# EAGLE board PCBAv (EAGLE 9.6.2)
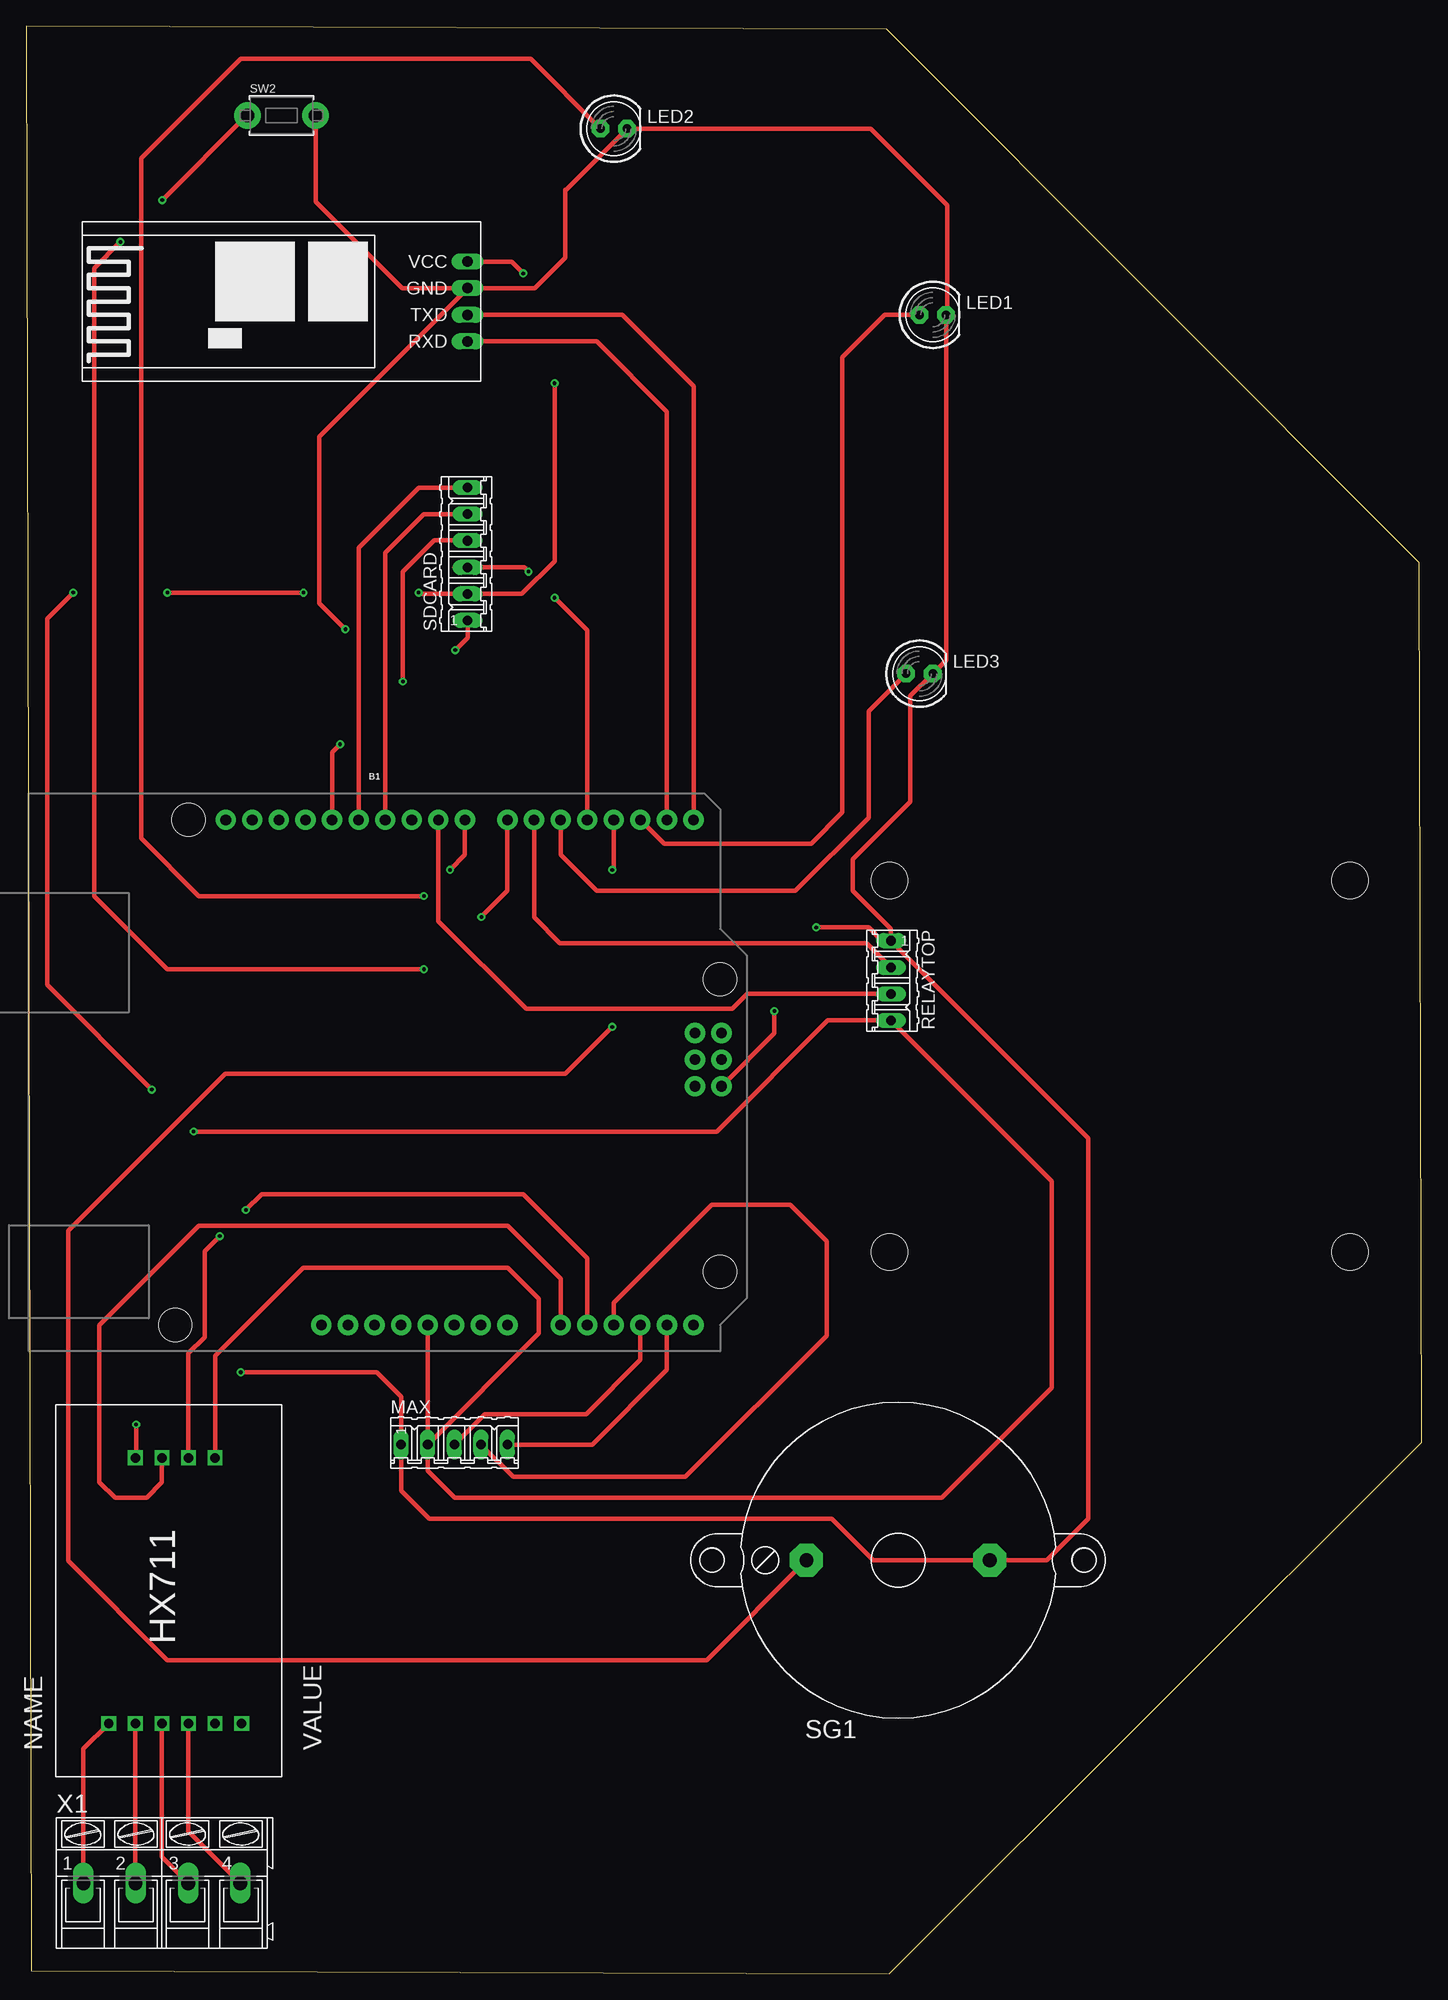
[diagram p0: board, top side]
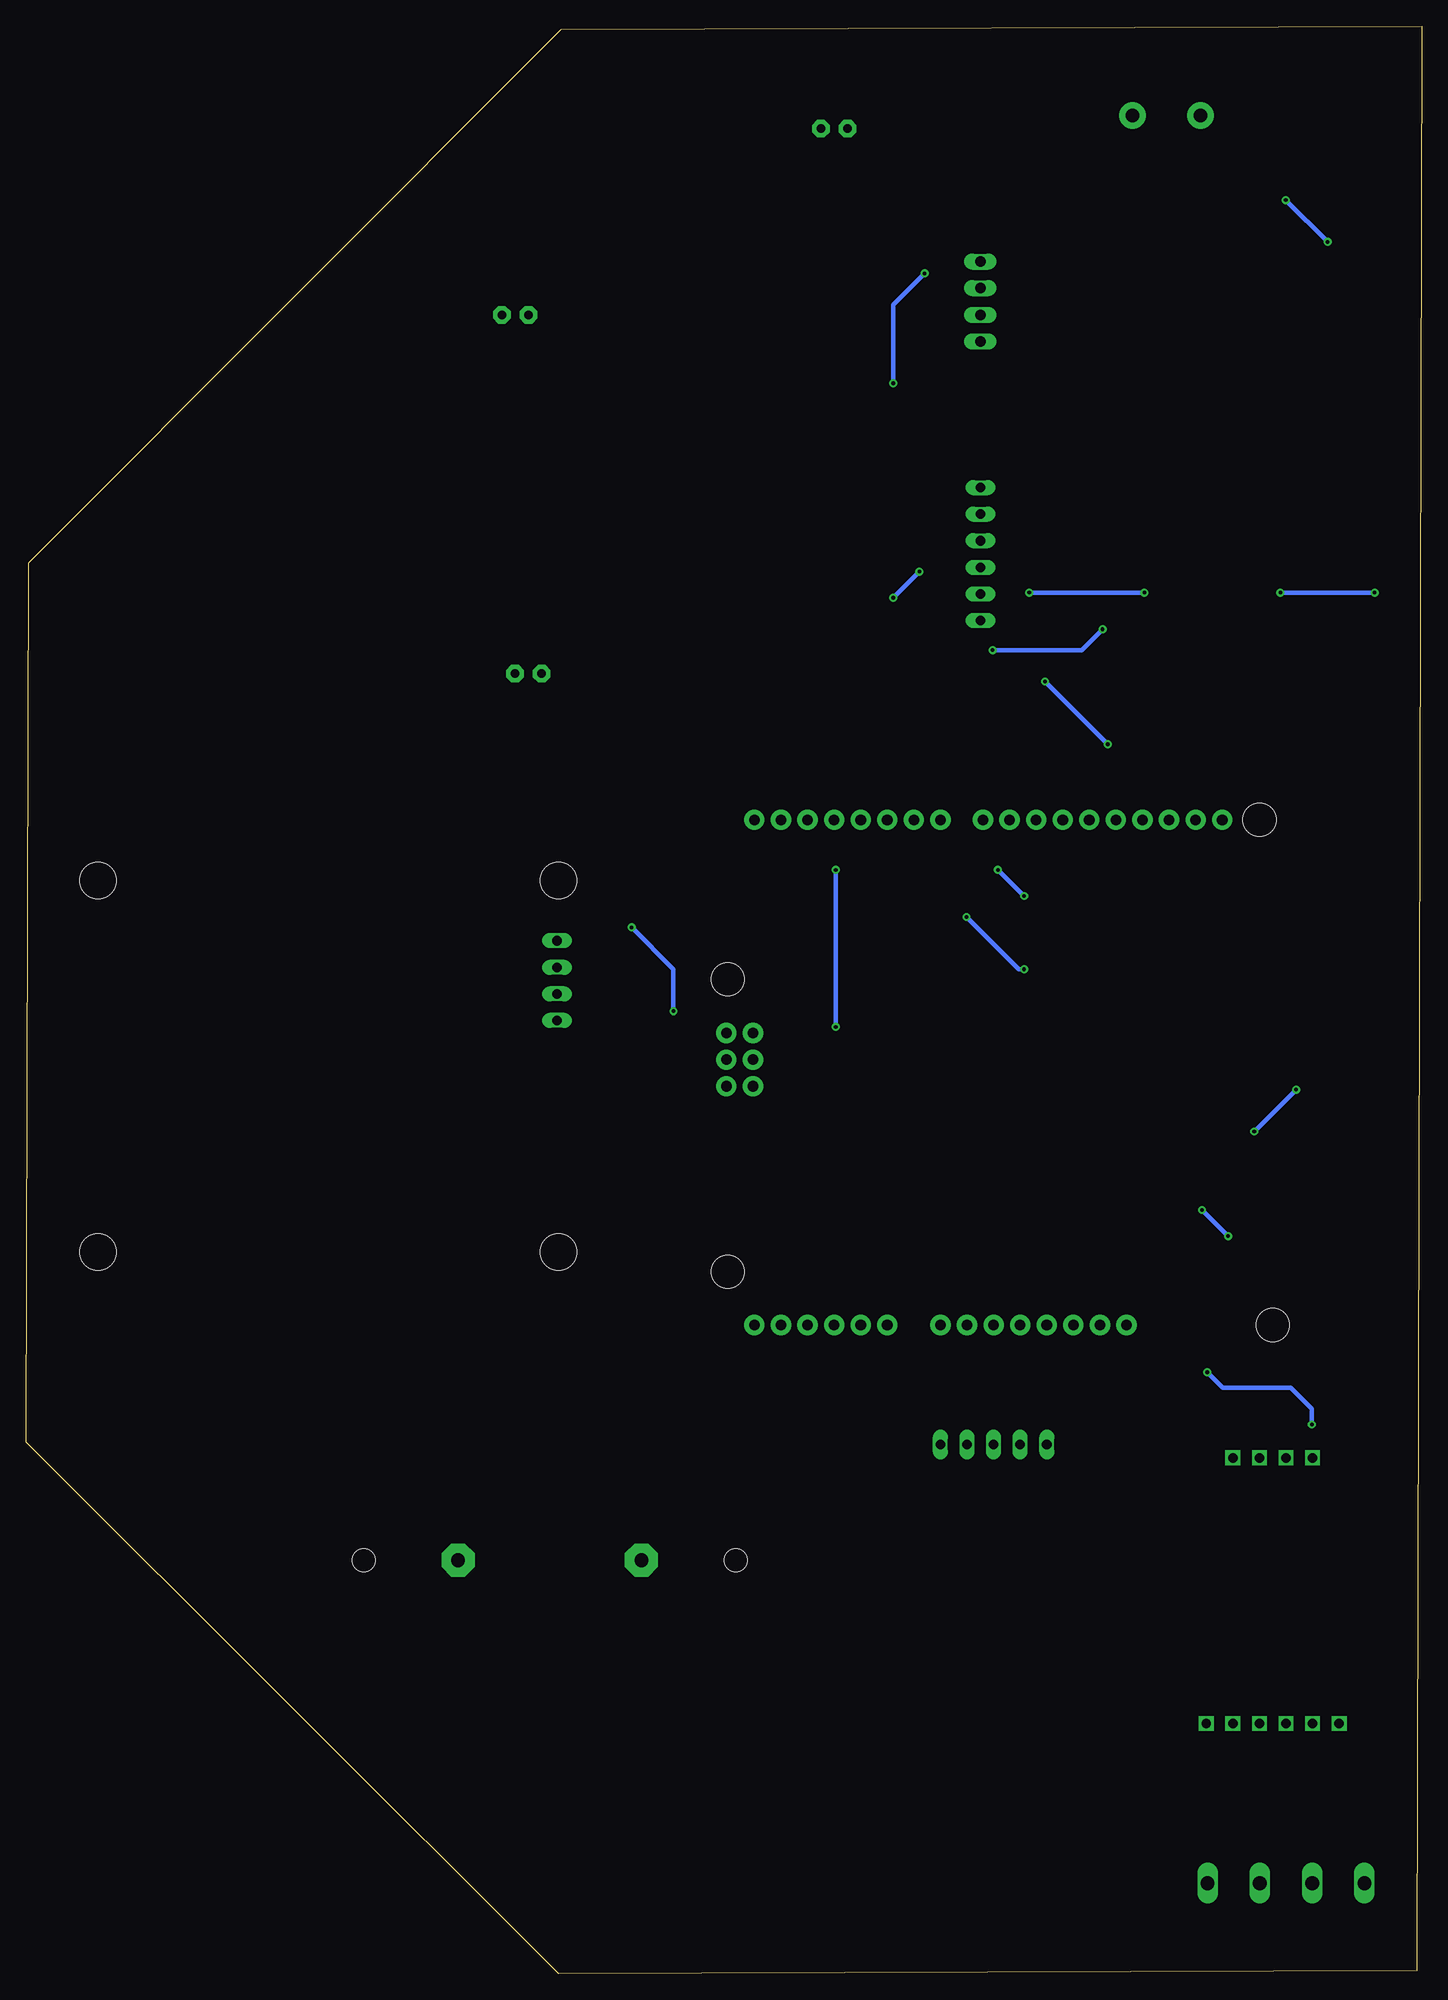
[diagram p1: board, bottom side, seen from below]

Size 133.35 x 186.11 mm. Coordinates in mm from the lower left corner, seen from the top.
Outline: 0.5,0.31 82.48,0 133.35,50.82 133.13,134.84 82.22,185.8 0,186.11 0.5,0.31
Copper layers (1*16): Top 0.035mm / dielectric 1.5mm / Bottom 0.035mm
Design rules "default": minimum track width 6mil, minimum drill 0.35mm, track to track 6mil, track to pad 6mil, pad to pad 6mil, via to via 6mil, smd to smd 6mil, copper to edge 40mil, drill to drill 6mil, minimum pad ring 10mil, minimum via ring 8mil, stop-mask expansion 4mil, vias tented up to drill 0mil, thermal gap 10mil
Holes 3.5 mm at 82.5,104.49 126.5,104.49 126.5,68.99 82.5,68.99

## Footprints (pad centres in the part's own frame; a part is rotated, then mirrored left to right if it is on the bottom)
ARDUINO_R3 = drill 1.016 pad 1.93: 3.3V 2.54,-24.13; 5V 5.08,-24.13; A0 17.78,-24.13; A1 20.32,-24.13; A2 22.86,-24.13; A3 25.4,-24.13; A4 27.94,-24.13; A5 30.48,-24.13; AREF -9.144,24.13; D0 30.48,24.13; D1 27.94,24.13; D2 25.4,24.13; D3 22.86,24.13; D4 20.32,24.13; D5 17.78,24.13; D6 15.24,24.13; D7 12.7,24.13; D8 8.636,24.13; D9 6.096,24.13; D10 3.556,24.13; D11 1.016,24.13; D12 -1.524,24.13; D13 -4.064,24.13; GND@1 7.62,-24.13; GND@2 10.16,-24.13; GND@3 -6.604,24.13; GND@4 33.16,-1.32; IOREF -2.54,-24.13; MISO 30.62,3.76; MOSI 33.16,1.22; NC -5.08,-24.13; RESET@1 0,-24.13; RESET@2 30.62,-1.32; SCK 30.62,1.22; SCL -14.224,24.13; SDA -11.684,24.13; VCC 33.16,3.76; VIN 12.7,-24.13 | hole 3.175: -17.78,24.13; 33.02,8.89; 33.02,-19.05; -19.05,-24.13
BLUETOOTH = drill 1 pad 1.549 long: 1 -6.35,3.81; 2 -6.35,1.27; 3 -6.35,-1.27; 4 -6.35,-3.81
LED5MM = drill 0.813 pad 1.676 octagon: A -1.27,0; K 1.27,0
05P = drill 0.914 long: 1 -5.08,0; 2 -2.54,0; 3 0,0; 4 2.54,0; 5 5.08,0
04P = drill 0.914 long: 1 -3.81,0; 2 -1.27,0; 3 1.27,0; 4 3.81,0
06P = drill 0.914 long: 1 -6.35,0; 2 -3.81,0; 3 -1.27,0; 4 1.27,0; 5 3.81,0; 6 6.35,0
F/BC35 = drill 1.321 pad 3.15 octagon: + 8.763,0; - -8.763,0 | hole 2.21: 17.78,0; -17.78,0
TACT_PANA-EVQ = drill 1.3 pad 2.54: P$1 -3.25,0; P$2 3.25,0
HX711 = drill 0.9 square: A+ 8.89,21.59; A- 8.89,24.13; B+ 8.89,16.51; B- 8.89,19.05; DT 34.29,24.13; E+ 8.89,29.21; E- 8.89,26.67; GND 34.29,26.67; SCK 34.29,21.59; VCC 34.29,19.05
AK300/4 = drill 1.321 long: 1 -7.493,0; 2 -2.515,0; 3 2.515,0; 4 7.493,0

## Placement (x,y rotation side)
B1  ARDUINO_UNO_R3  [ARDUINO_R3]  33.29,86.14 0 top
HC05  [BLUETOOTH]  35.83,159.8 180 top
LED1  Green  [LED5MM]  86.63,158.53 0 top
LED2  Red  [LED5MM]  56.15,176.31 0 top
LED3  Yellow  [LED5MM]  85.36,124.24 0 top
MAX  [05P]  40.91,50.58 0 top
RELAYTOP  [04P]  82.63,94.91 270 top
SDCARD  [06P]  42.18,135.67 90 top
SG1  F/BC35  [F/BC35]  83.32,39.53 180 top
SW2  [TACT_PANA-EVQ]  24.4,177.58 0 top
U$1  [HX711]  37.1,15.02 90 top
X1  [AK300/4]  12.97,8.67 0 top

## Library data of the parts
B1 = SparkFun-Boards
HC05 = Bluetooth
LED1-LED3 SW2 = adafruit
MAX RELAYTOP SDCARD = con-amp-quick; OC_FARNELL: unknown; OC_NEWARK: unknown
SG1 = buzzer; OC_FARNELL: unknown; OC_NEWARK: unknown
U$1 = HX711
X1 = con-ptr500; OC_FARNELL: unknown; OC_NEWARK: unknown

## Nets
3.3V: B1.GND@4 HC05.3 LED1.K LED2.K LED3.K MAX.1 RELAYTOP.1 SDCARD.1 SG1.- SW2.P$2 U$1.GND
N$1: B1.D1 HC05.1
N$2: B1.A0 U$1.DT
N$3: B1.D0 HC05.2
N$4: B1.D7 SW2.P$1
N$5: U$1.E+ X1.1
N$6: U$1.E- X1.2
N$7: U$1.A- X1.3
N$8: U$1.A+ X1.4
N$9: B1.A4 MAX.5
N$10: B1.A2 MAX.4
N$11: B1.A3 MAX.3
N$12: B1.D4 SDCARD.3
N$13: B1.D11 SDCARD.5
N$14: B1.D13 SDCARD.4
N$15: B1.D12 SDCARD.6
N$17: B1.D8 LED2.A
N$18: B1.D2 LED1.A
N$19: B1.D5 LED3.A
N$20: B1.D3 SG1.+
N$21: B1.D9 RELAYTOP.3
N$23: B1.D6 RELAYTOP.2
N$24: B1.A1 U$1.SCK
VCC: B1.5V HC05.4 MAX.2 RELAYTOP.4 SDCARD.2 U$1.VCC

## Tracks (layer width: path | path; a pad name or v marks a point on that pad's centre or on a via)
3.3V  (via drill 0.35)
  Top 0.406: HC05.3 48.58,161.07 51.5,163.99 51.5,170.49 51.6,170.49 LED2.K 80.68,176.31 88,168.99 88,158.63 LED1.K 87.9,125.51 LED3.K 84.5,122.11 84.5,111.99 79,106.49 79,103.49 82.63,99.86 RELAYTOP.1 | SW2.P$2 27.65,169.34 35.92,161.07 HC05.3 | HC05.3 28,146.89 28,130.99 v30.5,128.49 | v41,126.49 42.18,127.67 SDCARD.1 | v10.5,52.49 10.5,49.38 U$1.GND | RELAYTOP.1 101.5,79.85 101.5,43.49 97.54,39.53 SG1.- 80.96,39.53 77,43.49 38.5,43.49 35.83,46.16 MAX.1 35.83,55.16 33.5,57.49 v20.5,57.49 | RELAYTOP.1 81.77,98.72 80.5,99.99 v75.5,99.99 | v71.5,91.99 71.5,89.87 B1.GND@4
  Bottom 0.406: v30.5,128.49 32.5,126.49 v41,126.49 | v20.5,57.49 19,55.99 12.5,55.99 10.5,53.99 v10.5,52.49 | v75.5,99.99 71.5,95.99 v71.5,91.99
N$1
  Top 0.406: B1.D1 61.23,149.26 54.5,155.99 HC05.1
N$2
  Top 0.406: U$1.DT 12.97,46.96 11.5,45.49 8.5,45.49 7,46.99 7,61.99 16.5,71.49 46,71.49 51.07,66.42 B1.A0
N$3
  Top 0.406: B1.D0 63.77,151.72 56.96,158.53 HC05.2
N$4  (via drill 0.35)
  Top 0.406: B1.D7 45.99,103.48 v43.5,100.99 | v38,95.99 13.5,95.99 6.5,102.99 6.5,162.99 v9,165.49 | v13,169.49 21.09,177.58 SW2.P$1
  Bottom 0.406: v43.5,100.99 38.5,95.99 v38,95.99 | v9,165.49 v13,169.49
N$5
  Top 0.406: U$1.E+ 5.48,21.5 X1.1
N$6
  Top 0.406: U$1.E- 10.43,8.69 X1.2
N$7
  Top 0.406: U$1.A- 12.97,11.18 X1.3
N$8
  Top 0.406: U$1.A+ 15.51,13.62 X1.4
N$9
  Top 0.406: MAX.5 54.09,50.58 61.23,57.72 B1.A4
N$10
  Top 0.406: MAX.4 46.54,47.49 63,47.49 76.5,60.99 76.5,69.99 73,73.49 65.5,73.49 56.15,64.14 B1.A2
N$11
  Top 0.406: MAX.3 43.82,53.49 53.5,53.49 58.69,58.68 B1.A3
N$12  (via drill 0.35)
  Top 0.406: 40.91,134.4 SDCARD.3 47.59,134.4 v48,133.99 | v50.5,131.49 53.61,128.38 B1.D4
  Bottom 0.406: v48,133.99 v50.5,131.49
N$13
  Top 0.406: B1.D11 34.31,135.79 38,139.49 SDCARD.5
N$14  (via drill 0.35)
  Top 0.406: B1.D13 29.23,116.71 v30,117.49 | v36,123.49 36,133.99 39,136.99 42.13,136.99 SDCARD.4
  Bottom 0.406: v30,117.49 v36,123.49
N$15
  Top 0.406: B1.D12 31.77,136.25 37.53,142.02 SDCARD.6
N$17  (via drill 0.35)
  Top 0.406: B1.D8 41.93,106.91 v40.5,105.49 | v38,102.99 16.5,102.99 11,108.49 11,173.49 20.5,182.99 48.2,182.99 LED2.A
  Bottom 0.406: v40.5,105.49 v38,102.99
N$18
  Top 0.406: B1.D2 60.97,107.99 75,107.99 78,110.99 78,154.49 82.04,158.53 LED1.A
N$19
  Top 0.406: B1.D5 51.07,106.92 54.5,103.49 73.5,103.49 80.5,110.49 80.5,120.65 LED3.A
N$20  (via drill 0.35)
  Top 0.406: SG1.+ 65.02,29.99 13.5,29.99 4,39.49 4,70.99 19,85.99 51.5,85.99 v56,90.49 | B1.D3 56.15,105.64 v56,105.49
  Bottom 0.406: v56,105.49 v56,90.49
N$21
  Top 0.406: B1.D9 39.39,100.6 47.77,92.22 67.47,92.22 68.89,93.64 RELAYTOP.3
N$23
  Top 0.406: B1.D6 48.53,100.96 51,98.49 80.32,98.49 RELAYTOP.2
N$24  (via drill 0.35)
  Top 0.406: B1.A1 53.61,68.38 47.5,74.49 22.5,74.49 v21,72.99 | U$1.SCK 15.51,59.31 17.05,60.85 17.05,69.04 v18.5,70.49
  Bottom 0.406: v21,72.99 v18.5,70.49
VCC  (via drill 0.35)
  Top 0.406: U$1.VCC 18.05,59.04 26.5,67.49 46,67.49 49,64.49 49,61.21 MAX.2 | HC05.4 46.38,163.61 v47.5,162.49 | v50.5,151.99 50.5,134.99 47.37,131.86 SDCARD.2 37.63,131.86 v37.5,131.99 | MAX.2 38.37,48.08 40.96,45.49 87.5,45.49 98,55.99 98,75.73 RELAYTOP.4 76.61,91.1 66,80.49 v16,80.49 | v12,84.49 2,94.49 2,129.49 v4.5,131.99 | v13.5,131.99 v26.5,131.99 | MAX.2 B1.5V
  Bottom 0.406: v47.5,162.49 50.5,159.49 v50.5,151.99 | v16,80.49 v12,84.49 | v37.5,131.99 v26.5,131.99 | v4.5,131.99 v13.5,131.99